# Altium PCB newPCB.PcbDoc
Units mil, origin at the board's own origin, x right, y up, seen from the top; angles counter-clockwise.
Board outline 2805 x 2325 mil, 4 copper layers (Top Layer, GND, PWR, Bottom Layer), stack 23.756 mil thick; 31 components, 23 nets, 125 pads, 13 vias.
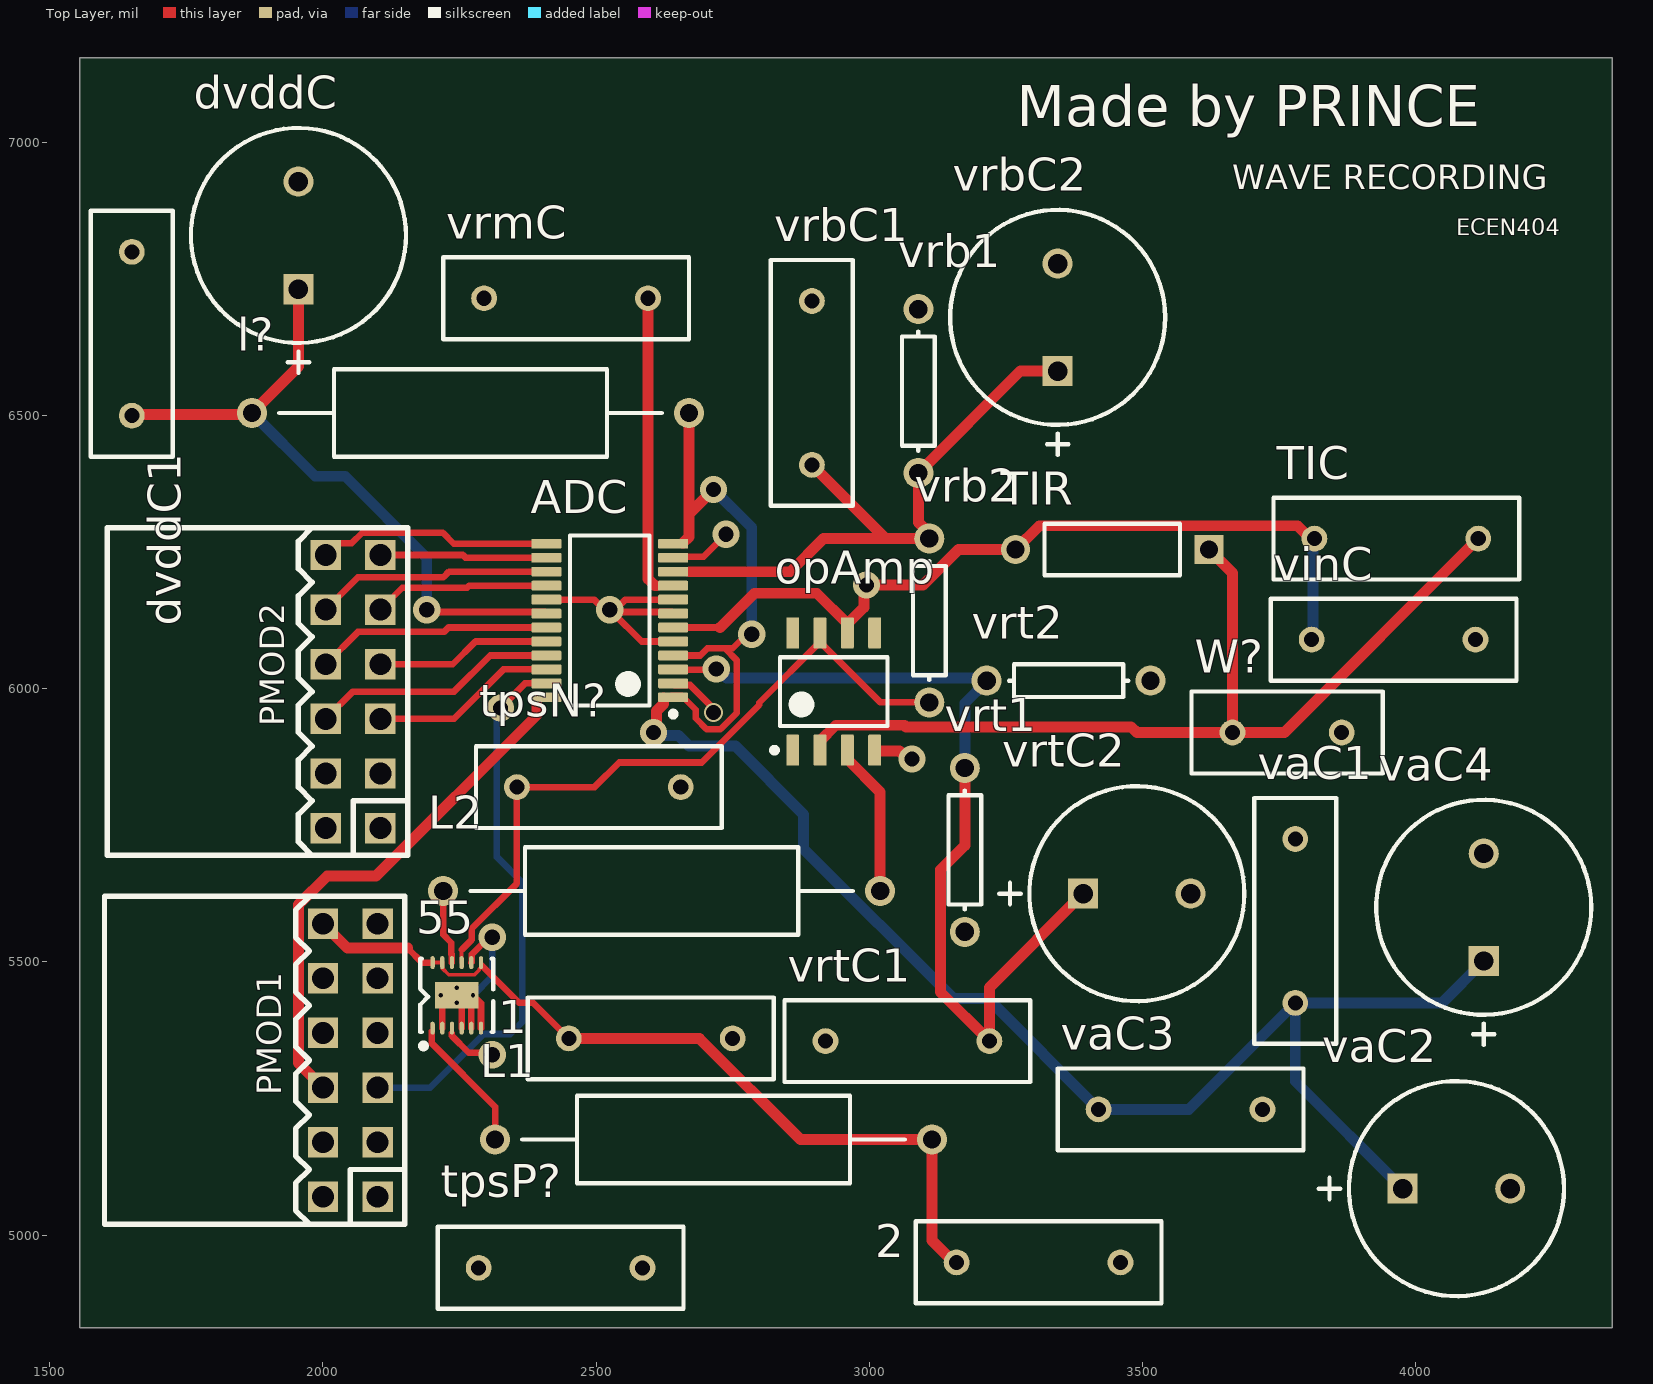
[diagram p0: Top Layer view]
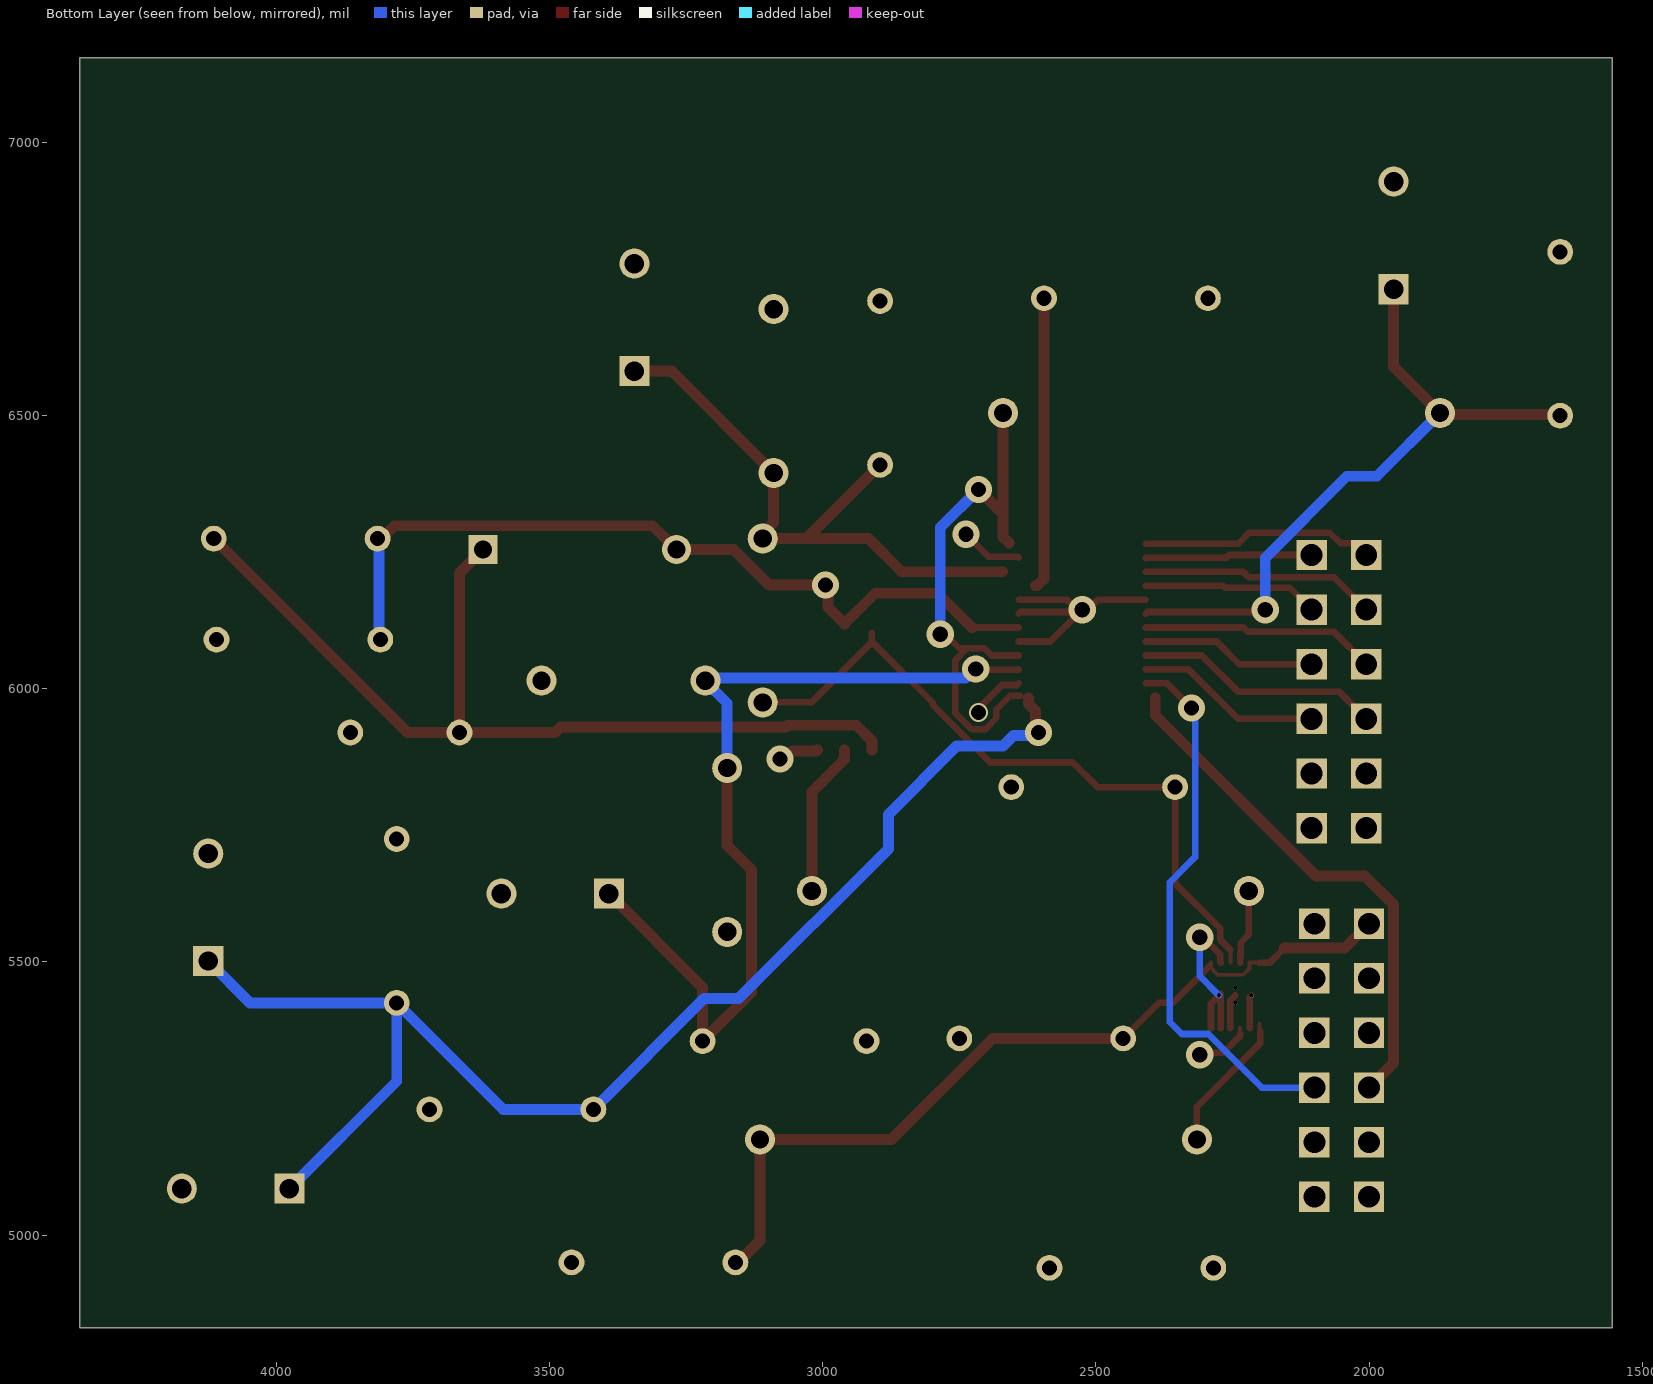
[diagram p1: Bottom Layer view, seen from below]
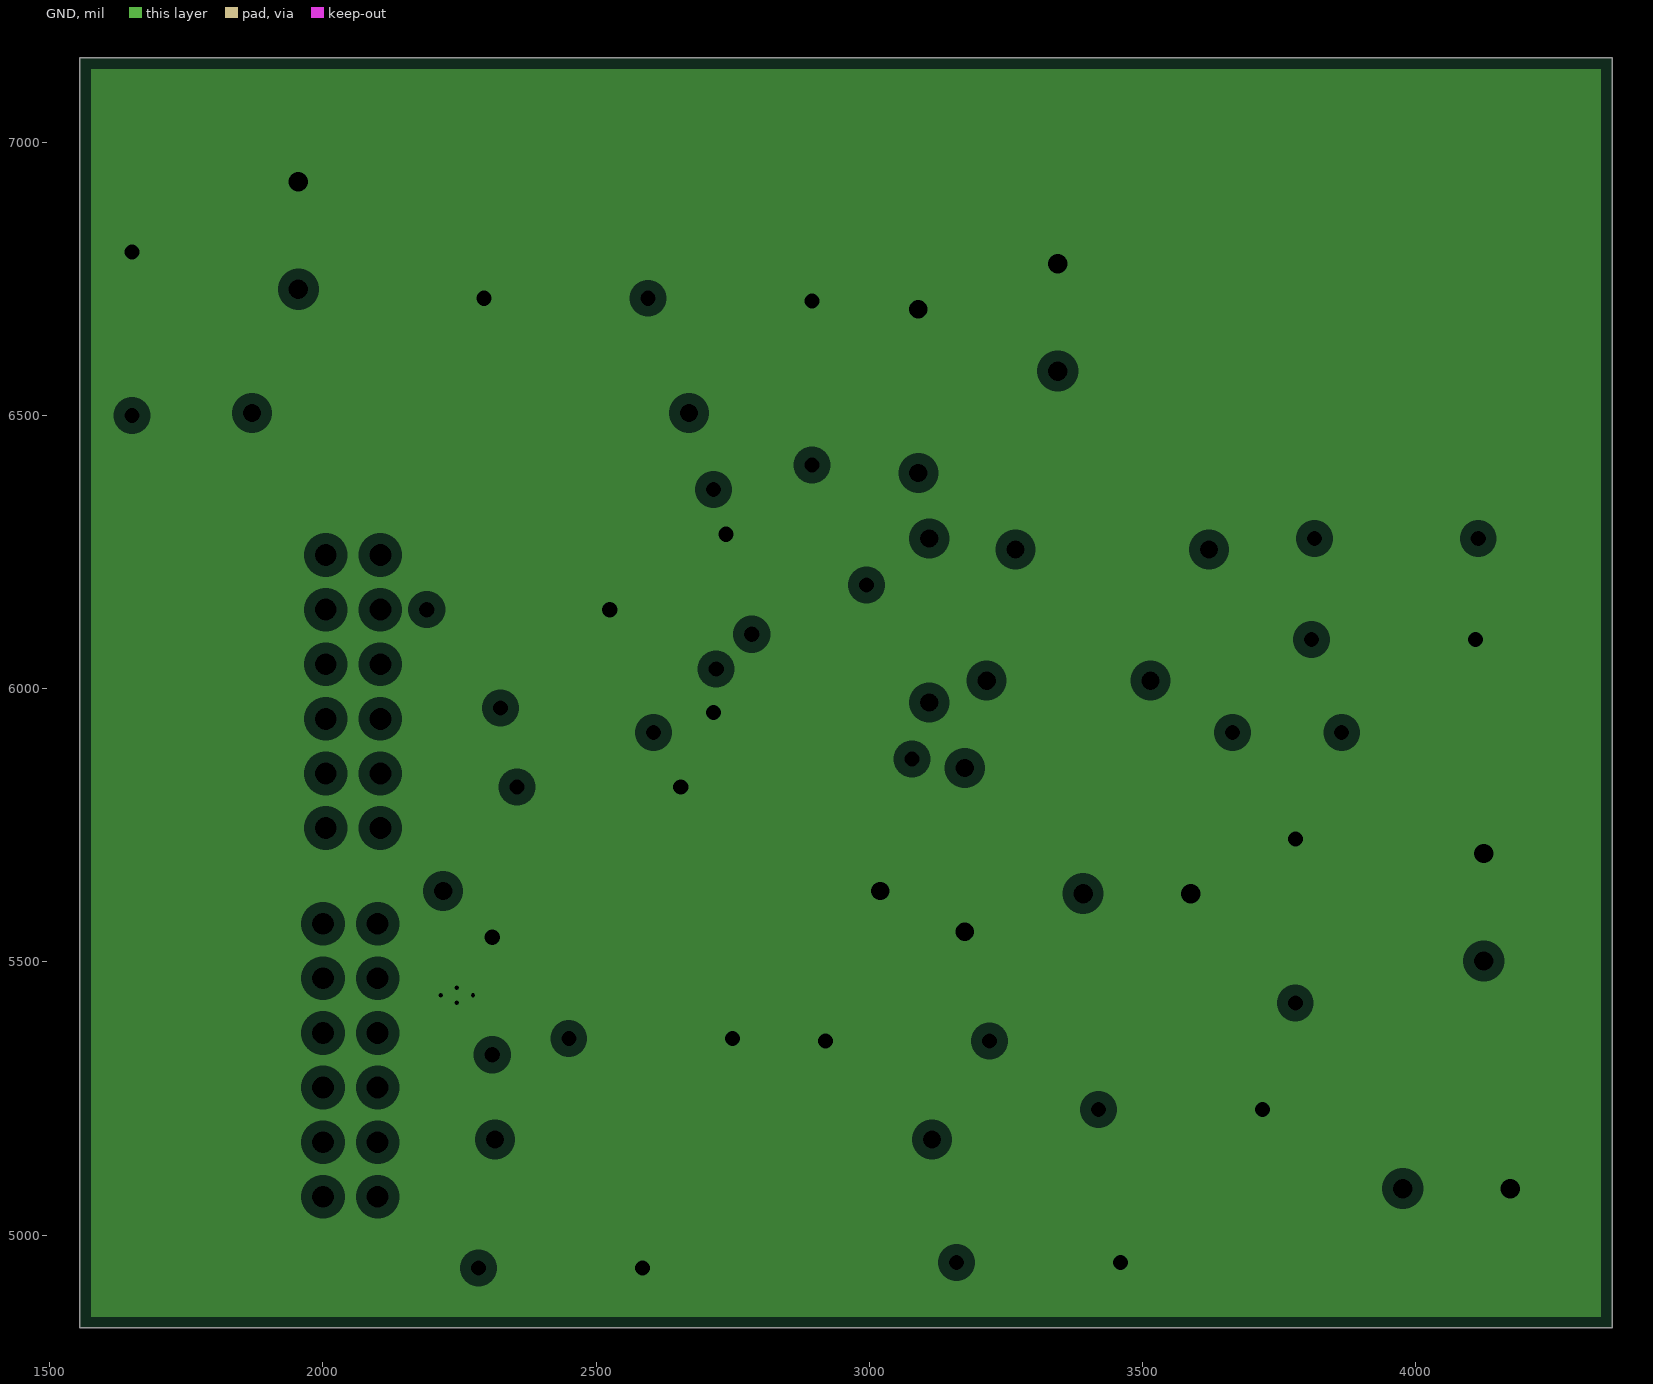
[diagram p2: GND, clearances drawn from the general rule]
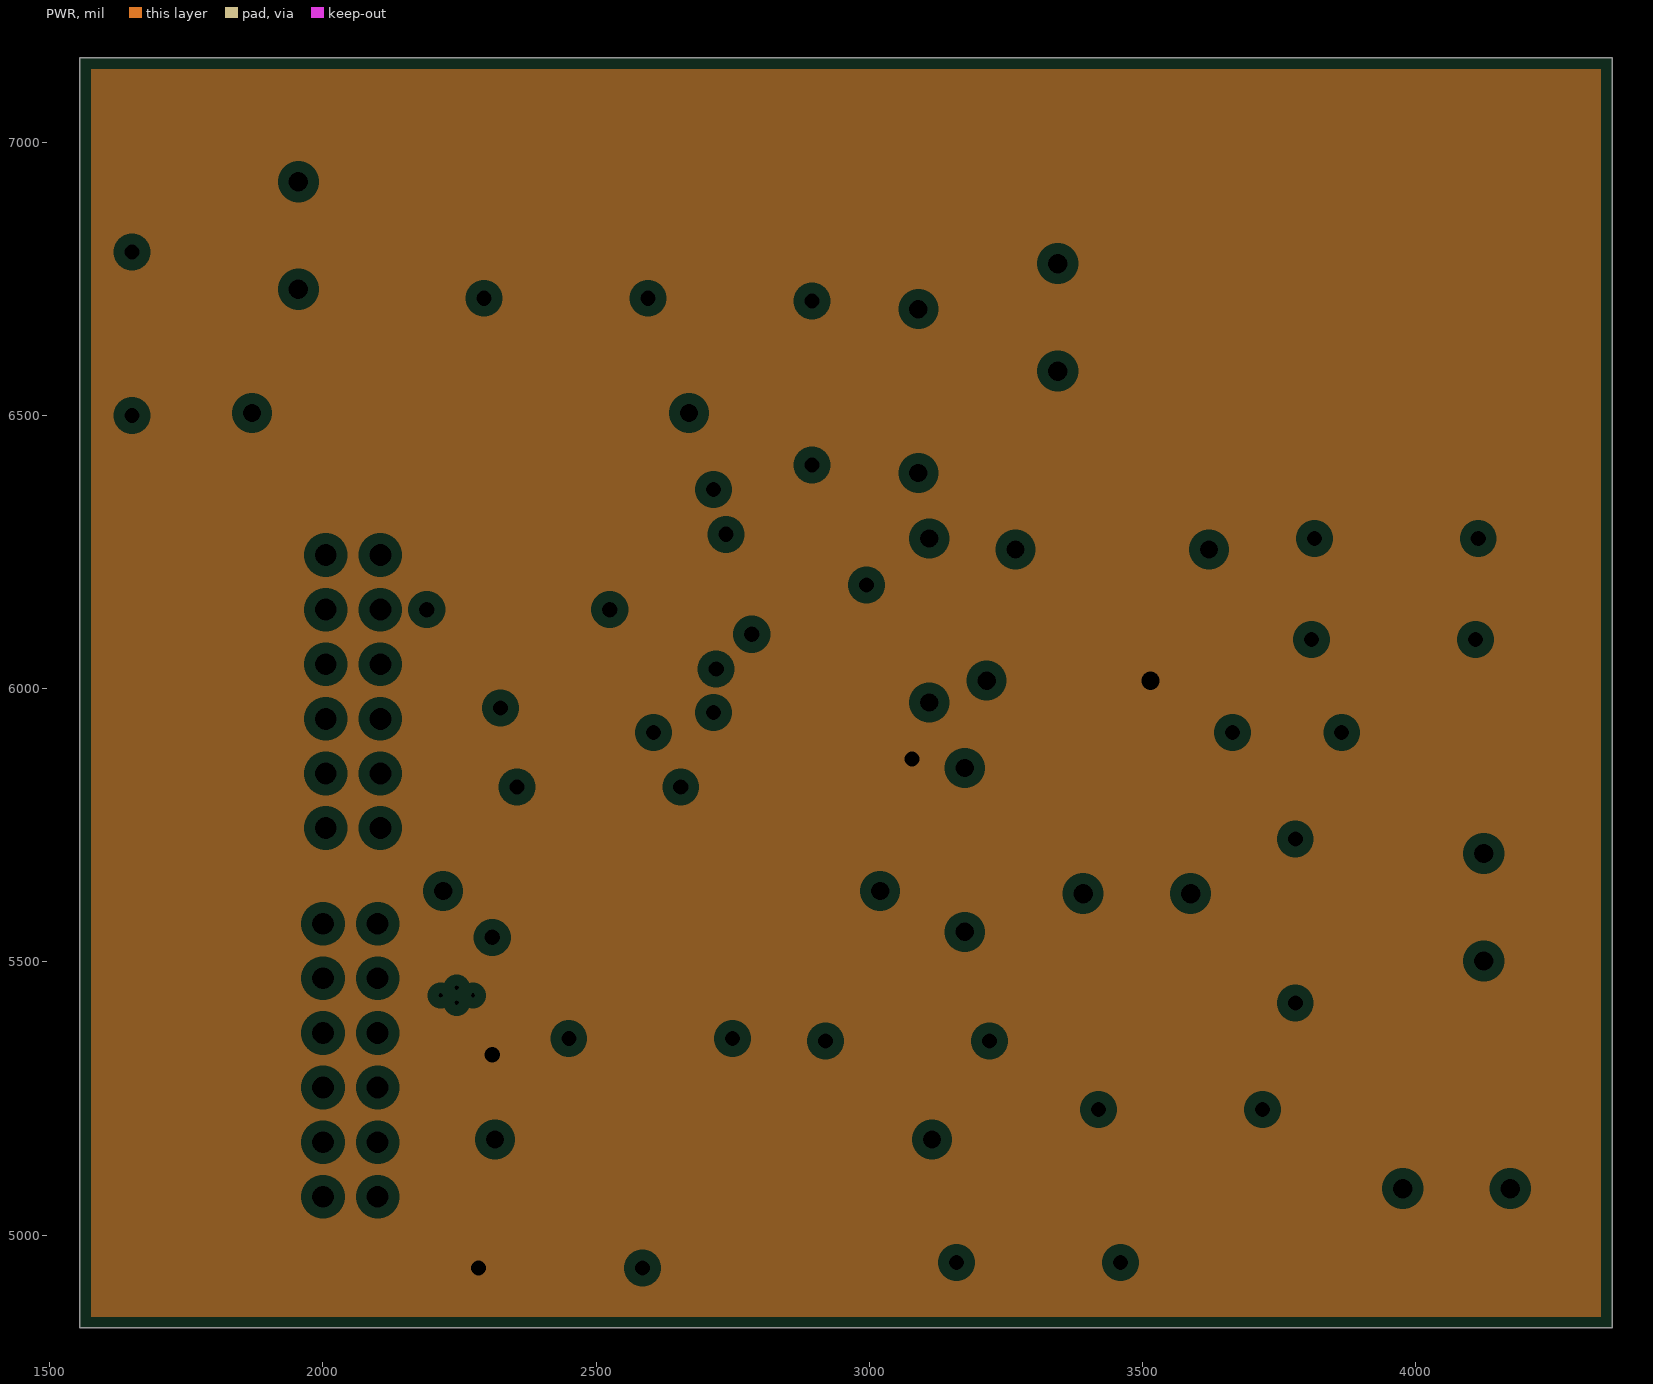
[diagram p3: PWR, clearances drawn from the general rule]

## Layer stack, top to bottom
Top Solder: solder mask 0.4, Solder Resist, Dk 3.5
Top Layer: signal copper 1.4
Dielectric 2: prepreg 2.8, PP-006, Dk 4.1
GND: plane copper 1.378, net GND
Dielectric 1: dielectric 12.6, FR-4, Dk 4.8
PWR: plane copper 1.378, net Net55_3
Dielectric 3: prepreg 2.8, PP-006, Dk 4.1
Bottom Layer: signal copper 1.4
Bottom Solder: solder mask 0.4, Solder Resist, Dk 3.5

## Board outline
1555,4830 4360,4830 4360,7155 1555,7155
cut-out: 0,4035

## Design rules (kind name [scope] priority, off if disabled: settings)
Clearance [All] p1: gap=7 ignorepadtopadclearanceinfootprint=FALSE
PlaneClearance [All] p1: clearance=20
PlaneConnect [All] p1: planeconnectstyle=Relief reliefexpansion=20 reliefentries=4 reliefconductorwidth=10 reliefairgap=10
PolygonConnect [All] p1: connectstyle=Relief reliefconductorwidth=10 reliefentries=4 polygonreliefangle="90 Angle" airgapwidth=10
RoutingVias [All] p1: holewidth=28 width=50 viastyle="Through Hole" minholewidth=28 minwidth=50 maxholewidth=28 maxwidth=50
SolderMaskExpansion [All] p1: expansion=4 istentingtop=FALSE
Width [All] p1: maxlimit=20 minlimit=7 preferedwidth=12
28 further rules are at their usual default settings.

## Classes and differential pairs
component class new_new: 1 2 55 ADC dvddC dvddC1 L1 L2 l? opAmp TIC TIR tpsN? tpsP? vaC1 vaC2 vaC3 vaC4 vinC vrb1 vrb2 vrbC1 vrbC2 vrmC vrt1 vrt2 vrtC1 vrtC2 W?

## Components (designator, comment, footprint, x,y, rotation, side; value= is the part's Value field where it differs from the comment)
1 "" RAD-0.3 2600,5360 r180 top
2 "" RAD-0.3 3310,4950 r180 top
55 "tps" QFN45P305X305X80_HS-13N 2245,5438.78 r90 top
ADC "ADC08100CIMTC/NOPB" PW0024A_N 2525,6125 r180 top
dvddC "EEU-EE2G100" PNSC-EEU-EE2G100-2_V 1955,6830 r90 top
dvddC1 "Cap" RAD-0.3 1650,6650 r90 top value=100pF
L1 "Inductor Adj" AXIAL-0.8 2715,5175 r180 top
L2 "Inductor Adj" AXIAL-0.8 2620,5630 r0 top value=10mH
l? "Inductor Adj" AXIAL-0.8 2270,6505 r0 top value=10mH
opAmp "LMH6702MA/NOPB" D0008A_N 2935,5995 r90 top
PMOD1 "PA_PMOD_GPIO_DIL_HOST" PA_PMOD_DIL_FEMALE 2050,5320 r90 top
PMOD2 "PA_PMOD_GPIO_DIL_HOST" PA_PMOD_DIL_FEMALE 2055,5995 r90 top (schematic designator PMOD1)
TIC "" RAD-0.3 3965,6275 r180 top
TIR "" RESA60-630X240 3445,6255 r180 top
tpsN? "" RAD-0.3 2505,5820 r180 top
tpsP? "" RAD-0.3 2435,4940 r180 top
vaC1 "Cap" RAD-0.3 3780,5575 r90 top value=100pF
vaC2 "EEU-EE2G100" PNSC-EEU-EE2G100-2_V 4075,5085 r0 top
vaC3 "Cap" RAD-0.3 3570,5230 r0 top value=100pF
vaC4 "EEU-EE2G100" PNSC-EEU-EE2G100-2_V 4125,5600 r90 top
vinC "Cap" RAD-0.3 3960,6090 r180 top value=10pF
vrb1 "Res1" AXIAL-0.3 3090,6545 r270 top value=1K
vrb2 "Res1" AXIAL-0.3 3110,6125 r270 top value=1K
vrbC1 "Cap" RAD-0.3 2895,6560 r90 top value=100pF
vrbC2 "EEU-EE2G100" PNSC-EEU-EE2G100-2_V 3345,6680 r90 top
vrmC "Cap" RAD-0.3 2445,6715 r0 top value=.1uF
vrt1 "Res1" AXIAL-0.3 3175,5705 r90 top value=1K
vrt2 "Res1" AXIAL-0.3 3365,6015 r0 top value=1K
vrtC1 "Cap" RAD-0.3 3070,5355 r180 top value=100pF
vrtC2 "EEU-EE2G100" PNSC-EEU-EE2G100-2_V 3490,5625 r0 top
W? "Jumper" RAD-0.2 3765,5920 r180 top

## Footprints (in the part's own frame and the unit in brackets; to place one, negate y for a bottom-side part, rotate by r counter-clockwise, add the part's x,y. Pads: shape width x height; smd on the part's side, far side on the other; paste and mask are expansions set on the pad)
AXIAL-0.3 [mm] "Axial Device, Thru-Hole; 2 Leads; 0.3 in Pin Spacing"
  round 1.4 hole 0.85: 1(-3.81,0) 2(3.81,0)
  silkscreen extent -2.77,-0.76 2.77,0.76
AXIAL-0.8 [mm] "Axial Device, Thru-Hole; 2 Leads; 0.8 in Pin Spacing"
  round 1.4 hole 0.85: 1(-10.16,0) 2(10.16,0)
  silkscreen extent -8.89,-2.03 8.89,2.03
D0008A_N [mm] "SOIC, 8-Leads, Body 5x4mm, Pitch 1.27mm, IPC Medium Density"
  rrect17% 1.45x0.6 smd: 1(-2.725,1.905) 2(-2.725,0.635) 3(-2.725,-0.635) 4(-2.725,-1.905) 5(2.725,-1.905) 6(2.725,-0.635) 7(2.725,0.635) 8(2.725,1.905)
  silkscreen extent -2.85,-2.5 1.6,2.88, body extent -3,-2.45 3,2.45, height 1.63
PA_PMOD_DIL_FEMALE [mil]
  rect 55.7x55.7 hole 40: 1(-250,-50) 2(-150,-50) 3(-50,-50) 4(50,-50) 5(150,-50) 6(250,-50) 7(-250,50) 8(-150,50) 9(-50,50) 10(50,50) 11(150,50) 12(250,50)
  silkscreen extent -300,-100 300,450
PNSC-EEU-EE2G100-2_V [mm] "Through-hole, 2-Leads, Base 10x10mm, Height 22mm"
  rect 1.4x1.4 hole 0.9: 1(-2.5,0)
  round 1.4 hole 0.9: 2(2.5,0)
  silkscreen extent -6.4,-5 5,5, body extent -5,-5 5,5, height 22
PW0024A_N [mm] "SOP, 24-Leads, Body 7.9x4.5mm, Pitch 0.65mm, IPC Medium Density"
  rrect22% 1.4x0.45 smd: 1(-2.95,3.575) 2(-2.95,2.925) 3(-2.95,2.275) 4(-2.95,1.625) 5(-2.95,0.975) 6(-2.95,0.325) 7(-2.95,-0.325) 8(-2.95,-0.975) 9(-2.95,-1.625) 10(-2.95,-2.275) 11(-2.95,-2.925) 12(-2.95,-3.575) 13(2.95,-3.575) 14(2.95,-2.925) 15(2.95,-2.275) 16(2.95,-1.625) 17(2.95,-0.975) 18(2.95,-0.325) 19(2.95,0.325) 20(2.95,0.975) 21(2.95,1.625) 22(2.95,2.275) 23(2.95,2.925) 24(2.95,3.575)
  silkscreen extent -3.08,-3.95 1.85,4.47, body extent -3.21,-3.9 3.21,3.9, height 1
QFN45P305X305X80_HS-13N [mm] "QFN, 12-Leads, Body 3.05x3.05mm, Pitch 0.45mm, Thermal Pad 1.22x2.03mm, IPC Medium Density"
  oval 0.6x0.2 smd: 1(-1.525,1.125) 2(-1.525,0.675) 3(-1.525,0.225) 4(-1.525,-0.225) 5(-1.525,-0.675) 6(-1.525,-1.125) 7(1.525,-1.125) 8(1.525,-0.675) 9(1.525,-0.225) 10(1.525,0.225) 11(1.525,0.675) 12(1.525,1.125)
  round 0.2 hole 0.203: 13(-0.35,0) 13(0,0.75) 13(0,-0.75) 13(0.35,0)
  rect 1.22x2.03 smd: 13(0,0)
  silkscreen extent -2.47,-1.7 1.7,1.7, body extent -1.55,-1.55 1.55,1.55, height 0.8
RAD-0.2 [mm] "Radial Cap, Thru-Hole; 2 Leads; 0.2 in Pin Spacing"
  round 1.2 hole 0.7: 1(-2.54,0) 2(2.54,0)
  silkscreen extent -4.44,-1.91 4.44,1.91
RAD-0.3 [mm] "Radial Cap, Thru-Hole; 2 Leads; 0.3 in Pin Spacing"
  round 1.2 hole 0.7: 1(-3.81,0) 2(3.81,0)
  silkscreen extent -5.71,-1.91 5.71,1.91
RESA60-630X240 [mm] "Axial Resistor, 2-Leads, Dia 2.4mm, Body Length 6.3mm"
  rect 1.35x1.35 hole 0.85: 1(-4.5,0)
  round 1.35 hole 0.85: 2(4.5,0)
  silkscreen extent -3.15,-1.2 3.15,1.2, body extent -3.15,-1.2 3.15,1.2, height 2.4

## Part data
1 2 TIC tpsN? tpsP?: library part Cap, "Capacitor", LatestRevisionDate=17-Jul-2002, LatestRevisionNote="Re-released for DXP Platform.", PackageDescription="Radial Cap, Thru-Hole; 2 Leads; 0.3 in Pin Spacing", PackageReference=RAD-0.3, Published=8-Jun-2000, Publisher="Altium Limited"
55: library part Component_1, Supplier Part Number 1=296-40874-1-ND, Supplier 1=Digi-Key
ADC: library part CMP-0054-00414-3, "8-Bit, 20 MSPS to 100 MSPS, 1.3 mW/Msps A/D Converter, 24-pin TSSOP, Pb-Free", Manufacturer="Texas Instruments", PackageTopMarking=NSUZXYTTE#*ADC08100*CIMTC, PowerWise=N, Code_JEDEC=MO-153-AD, ComponentLink1Description="Datasheet URL", ComponentLink1URL=http://www.ti.com/general/docs/lit/getliterature.tsp?genericPartNumber=ADC08100&fileType=pdf, CompType="ADC IC", PackageDescription="Molded TSSOP, Jedec, 7.8 x 4.4 x 0.9mm Body, 24 Lead, 0.65mm Pitch", PackageReference=PW0024A, PinCount=24, RoHS=Y
dvddC vaC2 vaC4 vrbC2 vrtC2: library part CMP-0736-00002-1, "Aluminum Electrolytic Capacitor, 10 uF +/- 20%, 400 V, -25 to 105 degC, 2-Pin 10 x 10 x 22 mm Through-hole, RoHS, Tape and Reel", Capacitance Tolerance="+/- 20%", Manufacturer=Panasonic, Rated Voltage="400 V", Ripple Current="430 mA", Temp. Range="-25 to 105 degC", Cap.="10 uF", ComponentLink1Description="Manufacturer URL", ComponentLink1URL=http://industrial.panasonic.com/, ComponentLink2Description=Datasheet, ComponentLink2URL=http://industrial.panasonic.com/www-data/pdf/ABA0000/ABA0000CE113.pdf, ComponentLink3Description="Package Specification", ComponentLink3URL=http://industrial.panasonic.com/www-data/pdf/ABA0000/ABA0000PE245.pdf, DatasheetVersion=Nov-12, Mounting Technology="Through Hole", PackageDescription="2-Pin Through-hole, Base 10 x 10 mm, Height 22 mm", PackageReference=EEU-EE2G100-2, PackageVersion=Nov-12, Packing="Tape and Reel", PartNumber=EEU-EE2G100, RoHS=TRUE
dvddC1 vaC1 vaC3 vinC vrbC1 vrmC vrtC1: "Capacitor", LatestRevisionDate=17-Jul-2002, LatestRevisionNote="Re-released for DXP Platform.", PackageDescription="Radial Cap, Thru-Hole; 2 Leads; 0.3 in Pin Spacing", PackageReference=RAD-0.3, Published=8-Jun-2000, Publisher="Altium Limited"
L1 L2 l?: "Adjustable Inductor", LatestRevisionDate=17-Jul-2002, LatestRevisionNote="Re-released for DXP Platform.", PackageDescription="Axial Device, Thru-Hole; 2 Leads; 0.8 in Pin Spacing", PackageReference=AXIAL-0.8, Published=24-Mar-1999, Publisher="Altium Limited", Set Position=0.5
opAmp: library part CMP-0055-00495-3, "1.7 GHz, Ultra Low Distortion, Wideband Op Amp, 8-pin Narrow SOIC, Pb-Free", Manufacturer="Texas Instruments", Package Reference=D0008A, PackageTopMarking=NSZXTT*LMH67*02MA, PowerWise=Y, Code_IPC=SOIC127P600-8, Code_JEDEC=MS-012-AA, ComponentLink1Description="Datasheet URL", ComponentLink1URL=http://www.ti.com/general/docs/lit/getliterature.tsp?genericPartNumber=LMH6702&fileType=pdf, CompType=Amplifiers, PackageDescription="SOIC Narrow, 4.9 x 3.9 x 1.45mm, 8 Lead, 1.27mm Pitch", PinCount=8, RoHS=Y
TIR: library part CMP-2000-07564-1, "Axial Resistor, 10 KOhm, +/- 1%, 0.25 W, -55 to 155 degC, 2-Pin THD, RoHS, Bulk", Case\/Package=Axial, Manufacturer=Yageo, Max Operating Temperature=155degC, Max Power Dissipation=250mW, Min Operating Temperature=-55degC, Package Description="2-Pin Axial Lead, Dia 2.4 mm, Body Length 6.3 mm", Package Quantity=200, Package Reference=MFR-25, Resistance=10KOhm, Temperature Coefficient=100ppm\/degreesC, Tolerance=1%, Voltage Rating=250V, Voltage Rating (DC)=200V, Composition=MetalFilm, Datasheet URL=http://www.yageo.com/documents/recent/Yageo%20LR_MFR_2013.pdf, Datasheet Version=04/2013, Lead Free=LeadFree, Length=0.248inch, Manufacturer URL=http://www.yageo.com/, Military Standard=Not, Mount=ThroughHole, Mounting Technology=ThroughHole, Number of Terminations=2, Packaging=Bulk, Power Rating=250mW, RoHSCompliant=True, Termination=Axial
vrb1 vrb2 vrt1 vrt2: "Resistor", LatestRevisionDate=17-Jul-2002, LatestRevisionNote="Re-released for DXP Platform.", PackageDescription="Axial Device, Thru-Hole; 2 Leads; 0.3 in Pin Spacing", PackageReference=AXIAL-0.3, Published=8-Jun-2000, Publisher="Altium Limited"
W?: "Jumper Wire", LatestRevisionDate=17-Jul-2002, LatestRevisionNote="Re-released for DXP Platform.", PackageDescription="Radial Cap, Thru-Hole; 2 Leads; 0.2 in Pin Spacing", PackageReference=RAD-0.2, Published=24-Mar-1999, Publisher="Altium Limited"

## Via types
v1: diameter 50, hole 28, Top Layer to Bottom Layer, 12 vias
v2: diameter 35, hole 28, Top Layer to Bottom Layer, 1 vias

## Nets (pads, with @x,y where several pads share a name; then routed paths per layer and width w, separated by ;. In a path a pad name is that pad's centre, name@x,y a point inside that pad or via, vN(x,y) a via of type N, cw(c..) or ccw(c..) an arc to the next point about the centre after c; other vN are vias at no path point)
GND: 1.1 2.1 55.2 55.4 55.5 55.6 55.8 55.13 ADC.2 ADC.5 ADC.7 ADC.8 ADC.11 ADC.17 dvddC1.2 dvddC.2 L2.2 opAmp.3 tpsN?.1 tpsP?.1 vaC1.2 vaC2.2 vaC3.2 vaC4.2 vinC.1 vrb1.1 vrbC1.2 vrbC2.2 vrmC.1 vrt1.1 vrtC1.2 vrtC2.2 | length 1448.4
  Top Layer w12: 55.13@2215.47,5438.78 2218.43,5435.83 55.2 ; 55.13@2245,5438.78 2253.86,5429.92 55.4 ; 55.5 2271.57,5435.83 55.13@2274.53,5438.78 ; 55.13@2271.57,5441.73 55.13@2274.53,5438.78 ; 55.8 2272.35,5499.6 2272.35,5513.71 2303.65,5545 v1(2310,5545) ; 55.6 2289.29,5424.02 55.13@2274.53,5438.78 ; ADC.17 2496.33,6163.39 2514.72,6145 v1(2525,6145) ; v1@2525,6152.09 v1(2525,6145) ; ADC.2 2644,6006.98 2672.07,6006.98 2715,5964.05 v2(2715,5956.61) ; ADC.5 2583.39,6086.61 v1@2529.35,6140.65 ; ADC.7 2638.28,6140.65 v1@2529.35,6140.65 ; ADC.8 2553.67,6163.39 2535.28,6145 v1(2525,6145) ; ADC.11 2642.97,6241.98 2696.98,6241.98 v1(2737.8,6282.8) ; v1(2525,6145) v1@2529.35,6140.65
  Top Layer w20: opAmp.3 2960,5870.98 3020,5810.98 L2.2
  Bottom Layer w12: 55.13@2274.53,5438.78 2310,5474.25 v1(2310,5545)
Net1_2: 1.2 2.2 55.7 55.11 55.12 L1.1 PMOD1.12 | length 1546.6
  Top Layer w7: 55.12 55.11 2218.59,5498.65 2218.59,5488.08 2230.16,5476.51 2277.55,5476.51 2286.01,5484.96 2286.01,5487.43 2289.29,5490.71 55.7
  Top Layer w12: 2155.15,5525.15 2181.48,5498.82 55.12 ; 55.7@2291.35,5493.01 2359.36,5425 2385,5425 1.2
  Top Layer w20: PMOD1.12 2044.85,5525.15 2155.15,5525.15 ; 1.2 2688.93,5360 2873.93,5175 L1.1 3115,4990 2.2@3155,4950
Net55_1: 55.1 L1.2 | length 253.7
  Top Layer w7: 55.1 55.1@2200.71,5386.61
  Top Layer w12: 55.1@2199.43,5372.93 2199.43,5350.57 2315,5235 L1.2
Net55_3: 55.3 opAmp.4 tpsP?.2 vrt2.2 | length 176.4
  Top Layer w7: 55.3@2236.14,5370.63 55.3
  Top Layer w12: 55.3@2236.14,5369.59 2236.14,5364.63 2267,5333.77 2306.23,5333.77 v1(2310,5330)
  Top Layer w20: opAmp.4 3010.45,5887.72 3011.81,5886.36 3055.2,5886.36 3070.2,5871.36 v1(3078.32,5871.36)
Net55_9: 55.9 opAmp.7 tpsN?.2 vrb2.2 | length 1292.9
  Top Layer w7: 55.9 2253.86,5522.08 2254.42,5522.64
  Top Layer w12: 2254.42,5522.64 2272,5540.22 2272,5560.74 2355,5643.74 tpsN?.2 2497.27,5820 2542.36,5865.09 2693.48,5865.09 2798.84,5970.44 2798.84,5974.39 opAmp.7@2910,6085.55 ; opAmp.7 opAmp.7@2910,6085.55 ; vrb2.2 3020.55,5975 opAmp.7@2910,6085.55
Net55_10: 55.10 L2.1 | length 137.9
  Top Layer w12: L2.1 2220,5550 2235,5535 2235,5514.07 2235.36,5513.71 2235.36,5499.6 55.10
NetADC_1: ADC.1 ADC.4 ADC.12 l?.2 vaC1.1 vaC2.1 vaC3.1 vaC4.1 | length 3501.4
  Top Layer w12: ADC.1@2638.28,5987.11 2656.98,5987.11 2682.53,5961.56 2682.53,5945.94 2702.37,5926.11 2727.63,5926.11 2757.7,5956.18 2757.7,6051.94 2735.44,6074.2 ; ADC.4 2690.78,6061.02 2703.96,6074.2 2735.44,6074.2 ; v1(2785,6100) 2775.78,6100 2749.98,6074.2 2735.44,6074.2
  Top Layer w20: v1(2605,5920) 2610.74,5925.74 2610.74,5959.57 2623.58,5972.41 ADC.1@2623.58,5983.11 ; ADC.12@2658.7,6266.89 2670,6278.19 2670,6320 ; l?.2 2670,6320 ; v1(2715,6365) 2670,6320
  Bottom Layer w20: v1(2605,5920) 2610.74,5914.26 2650.74,5914.26 2670,5895 2755,5895 2880,5770 2880,5706.98 3154.26,5432.72 3217.28,5432.72 vaC3.1 3585,5230 vaC1.1 ; v1(2715,6365) 2785,6295 v1(2785,6100) ; vaC2.1 3780,5281.57 vaC1.1 ; vaC4.1 4048.43,5425 vaC1.1
NetADC_3: ADC.3 vrt1.2 vrt2.1 vrtC1.1 vrtC2.1 | length 1662.6
  Top Layer w12: ADC.3 2641.36,6035.22 2718.71,6035.22 v1(2719.7,6036.2)
  Top Layer w20: vrt1.2 3175,5713.3 3130.44,5668.74 3130.44,5444.56 vrtC1.1 3220,5453.43 vrtC2.1
  Bottom Layer w20: v1@2712.5,6043.41 v1(2719.7,6036.2) ; v1@2723.12,6035 2738.56,6019.56 3210.44,6019.56 vrt2.1 3215,6013.6 3175,5973.6 vrt1.2
NetADC_6: ADC.6 opAmp.6 TIC.2 TIR.2 vinC.2 | length 1515.3
  Top Layer w12: ADC.6 2727.2,6112.2
  Top Layer w20: 2727.2,6112.2 2790,6175 2904.02,6175 2960,6119.02 2990.1,6149.11 2990.1,6185.1 v1(2995,6190) 3098.49,6190 3163.49,6255 TIR.2 3311.41,6298.57 3784.05,6298.57 3807.63,6275 TIC.2
  Bottom Layer w20: vinC.2 3812.5,6092.5 3812.5,6272.5 TIC.2
NetADC_9: ADC.9 vrmC.2 | length 534.9
  Top Layer w20: vrmC.2 2595,6201.39 2607.68,6188.71 2611.06,6188.71
NetADC_10: ADC.10 vrb1.2 vrb2.1 vrbC1.1 vrbC2.1 | length 1115.4
  Top Layer w20: 2671.22,6214.3 2855.51,6214.3 2916.21,6275 3030,6275 ; vrbC1.1 3030,6275 ; vrbC2.1 3276.57,6581.57 vrb1.2 3090,6304.5 3110,6284.5 vrb2.1 3030,6275
NetADC_13: ADC.13 PMOD2.12 | length 429.1
  Top Layer w12: PMOD2.12 2026.85,6266.85 2052.77,6266.85 2071.77,6285.85 2219.48,6285.85 2239.58,6265.75 ADC.13
NetADC_14: ADC.14 PMOD2.6 | length 307
  Top Layer w12: PMOD2.6 2256.08,6245 2260.93,6240.16 2406.04,6240.16 2407.45,6238.75 ADC.14
NetADC_15: ADC.15 PMOD2.11 | length 432.7
  Top Layer w12: PMOD2.11 2064.15,6204.15 2220.52,6204.15 2230.93,6214.57 ADC.15
NetADC_16: ADC.16 PMOD2.5 | length 322.1
  Top Layer w12: PMOD2.5 2145.15,6185.15 2264.31,6185.15 2268.14,6188.98 ADC.16
NetADC_18: ADC.18 dvddC1.1 dvddC.1 l?.1 | length 1230.3
  Top Layer w12: v1(2190,6145) 2194.35,6140.65 2406,6140.65 ADC.18
  Top Layer w20: dvddC1.1 1652.5,6502.5 1867.5,6502.5 l?.1 1955,6590 dvddC.1
  Bottom Layer w20: l?.1 1985.91,6389.09 2040.66,6389.09 2190,6239.74 v1(2190,6145)
NetADC_19: ADC.19 PMOD2.10 | length 431.7
  Top Layer w12: PMOD2.10 2064.15,6104.15 2221.7,6104.15 2229.75,6112.2 ADC.19
NetADC_20: ADC.20 PMOD2.4 | length 321.1
  Top Layer w12: PMOD2.4 2237.7,6045 2279.31,6086.61 ADC.20
NetADC_21: ADC.21 PMOD2.9 | length 451.9
  Top Layer w12: PMOD2.9 2055,5995 2240,5995 2306.02,6061.02 ADC.21
NetADC_22: ADC.22 PMOD2.3 | length 341.3
  Top Layer w12: PMOD2.3 2240,5945 2330.43,6035.43 ADC.22
NetADC_23: ADC.23 PMOD1.3 | length 1014.2
  Top Layer w12: v1(2325,5965) 2369.84,6009.84 ADC.23
  Bottom Layer w12: PMOD1.3 2196.26,5270 2294.26,5368 2343,5368 2365,5390 2365,5645.41 2318.38,5692.03 2318.38,5958.38 v1(2325,5965)
NetADC_24: ADC.24 PMOD1.9 | length 964.8
  Top Layer w20: PMOD1.9 1955.15,5314.85 1955.15,5604.89 2007.76,5657.5 2097.24,5657.5 2391.3,5951.56 ADC.24@2391.3,5983.11
NetopAmp_2: opAmp.2 TIC.1 TIR.1 W?.2 | length 1738.9
  Top Layer w20: opAmp.2 2910,5904.45 2938.81,5933.26 3064.53,5933.26 3067.35,5930.44 3479.56,5930.44 3490,5920 W?.2 ; TIR.1 3665,6212.17 W?.2 ; TIC.1 3760,5920 W?.2
pads on no net: opAmp.1 opAmp.5 opAmp.8 PMOD1.1 PMOD1.2 PMOD1.4 PMOD1.5 PMOD1.6 PMOD1.7 PMOD1.8 PMOD1.10 PMOD1.11 PMOD2.1 PMOD2.2 PMOD2.7 PMOD2.8 W?.1

## Polygon pours and split planes (outlines as drawn)
GND on GND (split plane): 4339.9,4850.1 1575.1,4850.1 1575.1,7134.9 4339.9,7134.9
Net55_3 on PWR (split plane): 4339.9,4850.1 1575.1,4850.1 1575.1,7134.9 4339.9,7134.9

## Silkscreen, mask and mechanical layers (free items; w line width, h text height)
Top Overlay:
  text "Made by PRINCE" at 3270,7029.99 h75
  text "WAVE RECORDING" at 3665,6915 h45
  text "ECEN404" at 4075,6830 h30